# Altium PCB ADD.PcbDoc (part 2 of 3)
Units mm, origin at the board's own origin, x right, y up, seen from the top; angles counter-clockwise.
Board outline 193.67 x 275.84 mm, 2 copper layers (Top Layer, Bottom Layer); 216 components, 0 nets, 1200 pads, 0 vias.
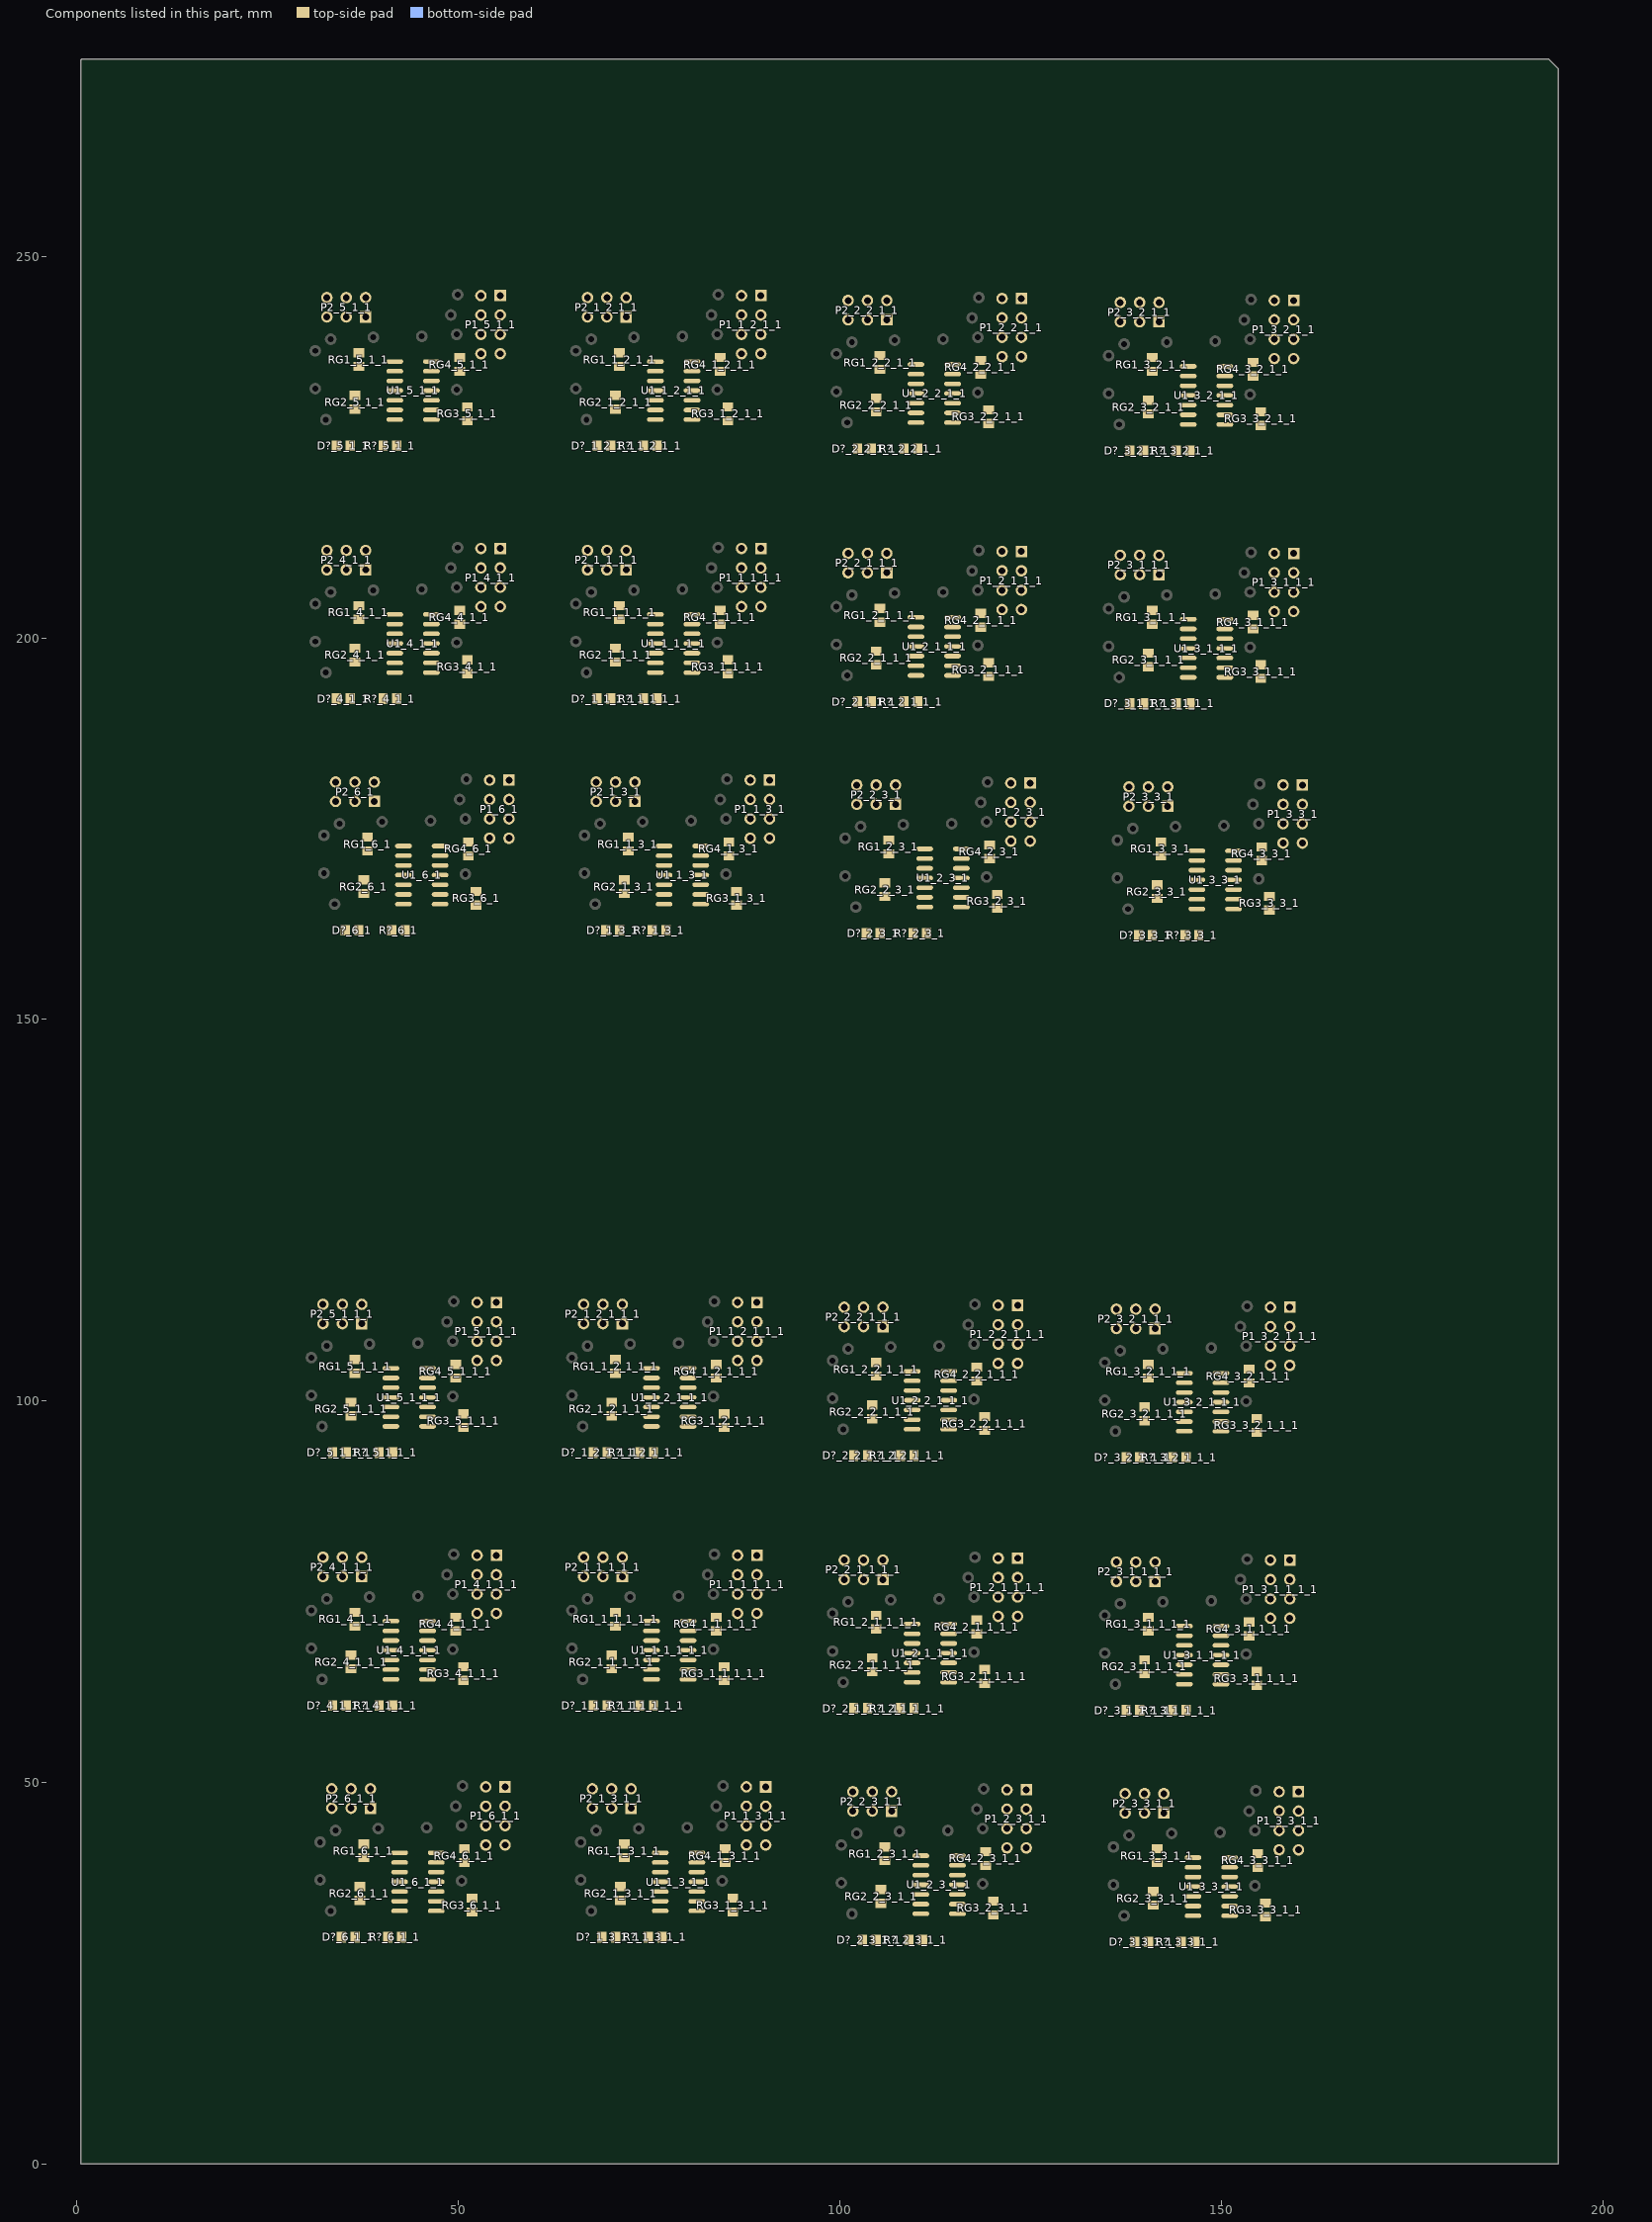
[diagram p2: the components of this part, seen from the top]

## Nets (pads, with @x,y where several pads share a name; then routed paths per layer and width w, separated by ;. In a path a pad name is that pad's centre, name@x,y a point inside that pad or via, vN(x,y) a via of type N, cw(c..) or ccw(c..) an arc to the next point about the centre after c; other vN are vias at no path point) (continued)
copper on no net: | length 9092.1
  Top Layer w0.254: 200.787,0 201.041,0.254 ; 0.508,0 0.508,275.717 0.635,275.844 192.913,275.844 194.183,274.574 194.183,0 0.508,0
  Top Layer w0.454: 28.88,69.532 29.451,68.961 39.738,68.961 40.119,68.58 40.5,68.58 ; 28.88,102.679 29.451,102.108 39.738,102.108 40.119,101.727 40.5,101.727 ; 29.388,201.486 29.959,200.914 40.246,200.914 40.627,200.533 41.008,200.533 ; 29.388,234.632 29.959,234.061 40.246,234.061 40.627,233.68 41.008,233.68 ; 30.023,39.179 30.594,38.608 40.881,38.608 41.262,38.227 41.643,38.227 ; 30.531,171.132 31.102,170.561 41.389,170.561 41.77,170.18 42.151,170.18 ; 30.721,72.517 30.721,75.438 32.245,76.962 ; 30.721,105.664 30.721,108.585 32.245,110.109 ; 31.229,204.47 31.229,207.391 32.753,208.915 ; 31.229,237.617 31.229,240.538 32.753,242.062 ; 31.864,42.164 31.864,45.085 33.388,46.609 ; 31.864,63.627 34.923,66.686 35.928,66.686 37.071,66.686 38.987,64.77 41.148,64.77 ; 31.864,96.774 34.923,99.833 35.928,99.833 37.071,99.833 38.987,97.917 41.148,97.917 ; 32.118,79.375 29.578,79.375 28.816,78.613 28.816,60.833 29.578,60.071 33.404,60.071 ; 32.118,112.522 29.578,112.522 28.816,111.76 28.816,93.98 29.578,93.218 33.404,93.218 ; 32.372,174.117 32.372,177.038 33.896,178.562 ; 32.372,195.58 35.431,198.639 36.436,198.639 37.579,198.639 39.495,196.723 41.656,196.723 ; 32.372,228.727 35.431,231.786 36.436,231.786 37.579,231.786 39.495,229.87 41.656,229.87 ; 32.626,211.328 30.086,211.328 29.324,210.566 29.324,192.786 30.086,192.024 33.912,192.024 ; 32.626,244.475 30.086,244.475 29.324,243.713 29.324,225.933 30.086,225.171 33.912,225.171 ; 32.753,74.041 32.753,71.247 34.034,69.966 41.032,69.966 41.148,69.85 ; 32.753,107.188 32.753,104.394 34.034,103.113 41.032,103.113 41.148,102.997 ; 33.007,33.274 36.066,36.333 37.071,36.333 38.214,36.333 40.13,34.417 42.291,34.417 ; 33.261,49.022 30.721,49.022 29.959,48.26 29.959,30.48 30.721,29.718 34.547,29.718 ; 33.261,205.994 33.261,203.2 34.542,201.919 41.54,201.919 41.656,201.803 ; 33.261,239.141 33.261,236.347 34.542,235.066 41.54,235.066 41.656,234.95 ; 33.515,165.227 36.574,168.286 37.579,168.286 38.722,168.286 40.638,166.37 42.799,166.37 ; 33.769,180.975 31.229,180.975 30.467,180.213 30.467,162.433 31.229,161.671 35.055,161.671 ; 33.896,43.688 33.896,40.894 35.177,39.613 42.175,39.613 42.291,39.497 ; 34.404,175.641 34.404,172.847 35.685,171.566 42.683,171.566 42.799,171.45 ; 34.785,76.962 34.785,74.93 35.42,74.295 38.341,74.295 ; 34.785,79.502 36.182,80.899 36.201,80.899 36.328,81.026 45.326,81.026 46.469,79.883 46.469,71.641 46.467,71.639 ; 34.785,110.109 34.785,108.077 35.42,107.442 38.341,107.442 ; 34.785,112.649 36.182,114.046 36.201,114.046 36.328,114.173 45.326,114.173 46.469,113.03 46.469,104.788 46.467,104.786 ; 35.293,208.915 35.293,206.883 35.928,206.248 38.849,206.248 ; 35.293,211.455 36.69,212.852 36.709,212.852 36.836,212.979 45.834,212.979 46.977,211.836 46.977,203.594 46.975,203.592 ; 35.293,242.062 35.293,240.03 35.928,239.395 38.849,239.395 ; 35.293,244.602 36.69,245.999 36.709,245.999 36.836,246.126 45.834,246.126 46.977,244.983 46.977,236.741 46.975,236.739 ; 35.304,60.071 39.6,60.071 ; 35.304,93.218 39.6,93.218 ; 35.812,192.024 40.108,192.024 ; 35.812,225.171 40.108,225.171 ; 35.928,46.609 35.928,44.577 36.563,43.942 39.484,43.942 ; 35.928,49.149 37.325,50.546 37.344,50.546 37.471,50.673 46.469,50.673 47.612,49.53 47.612,41.288 47.61,41.286 ; 35.928,64.886 35.939,64.897 37.071,64.897 38.468,63.5 41.148,63.5 43.04,63.5 43.04,79.248 42.786,79.502 37.325,79.502 ; 35.928,98.033 35.939,98.044 37.071,98.044 38.468,96.647 41.148,96.647 43.04,96.647 43.04,112.395 42.786,112.649 37.325,112.649 ; 36.436,178.562 36.436,176.53 37.071,175.895 39.992,175.895 ; 36.436,181.102 37.833,182.499 37.852,182.499 37.979,182.626 46.977,182.626 48.12,181.483 48.12,173.241 48.118,173.239 ; 36.436,196.839 36.447,196.85 37.579,196.85 38.976,195.453 41.656,195.453 43.548,195.453 43.548,211.201 43.294,211.455 37.833,211.455 ; 36.436,229.986 36.447,229.997 37.579,229.997 38.976,228.6 41.656,228.6 43.548,228.6 43.548,244.348 43.294,244.602 37.833,244.602 ; 36.447,29.718 40.743,29.718 ; 36.679,72.009 40.259,72.009 41.148,71.12 42.024,71.996 42.024,76.327 41.389,76.962 37.325,76.962 ; 36.679,105.156 40.259,105.156 41.148,104.267 42.024,105.143 42.024,109.474 41.389,110.109 37.325,110.109 ; 36.955,161.671 41.251,161.671 ; 37.071,34.533 37.082,34.544 38.214,34.544 39.611,33.147 42.291,33.147 44.183,33.147 44.183,48.895 43.929,49.149 38.468,49.149 ; 37.187,203.962 40.767,203.962 41.656,203.073 42.532,203.949 42.532,208.28 41.897,208.915 37.833,208.915 ; 37.187,237.109 40.767,237.109 41.656,236.22 42.532,237.096 42.532,241.427 41.897,242.062 37.833,242.062 ; 37.579,166.486 37.59,166.497 38.722,166.497 40.119,165.1 42.799,165.1 44.691,165.1 44.691,180.848 44.437,181.102 38.976,181.102 ; 37.822,41.656 41.402,41.656 42.291,40.767 43.167,41.643 43.167,45.974 42.532,46.609 38.468,46.609 ; 38.33,173.609 41.91,173.609 42.799,172.72 43.675,173.596 43.675,177.927 43.04,178.562 38.976,178.562 ; 41.148,67.31 39.103,67.31 38.214,68.199 30.34,68.199 30.34,61.722 41.262,61.722 41.4,61.584 41.4,60.071 54.597,60.071 54.978,60.452 54.978,72.136 54.978,74.676 54.978,77.216 54.978,79.756 ; 41.148,100.457 39.103,100.457 38.214,101.346 30.34,101.346 30.34,94.869 41.262,94.869 41.4,94.731 41.4,93.218 54.597,93.218 54.978,93.599 54.978,105.283 54.978,107.823 54.978,110.363 54.978,112.903 ; 41.656,199.263 39.611,199.263 38.722,200.152 30.848,200.152 30.848,193.675 41.77,193.675 41.908,193.537 41.908,192.024 55.105,192.024 55.486,192.405 55.486,204.089 55.486,206.629 55.486,209.169 55.486,211.709 ; 41.656,232.41 39.611,232.41 38.722,233.299 30.848,233.299 30.848,226.822 41.77,226.822 41.908,226.684 41.908,225.171 55.105,225.171 55.486,225.552 55.486,237.236 55.486,239.776 55.486,242.316 55.486,244.856 ; 42.291,36.957 40.246,36.957 39.357,37.846 31.483,37.846 31.483,31.369 42.405,31.369 42.543,31.231 42.543,29.718 55.74,29.718 56.121,30.099 56.121,41.783 56.121,44.323 56.121,46.863 56.121,49.403 ; 42.799,168.91 40.754,168.91 39.865,169.799 31.991,169.799 31.991,163.322 42.913,163.322 43.051,163.184 43.051,161.671 56.248,161.671 56.629,162.052 56.629,173.736 56.629,176.276 56.629,178.816 56.629,181.356 ; 44.31,74.803 44.691,74.422 44.048,73.779 44.048,63.889 44.437,63.5 45.948,63.5 50.522,63.5 50.66,63.362 ; 44.31,107.95 44.691,107.569 44.048,106.926 44.048,97.036 44.437,96.647 45.948,96.647 50.522,96.647 50.66,96.509 ; 44.818,206.756 45.199,206.375 44.556,205.732 44.556,195.842 44.945,195.453 46.456,195.453 51.03,195.453 51.168,195.315 ; 44.818,239.903 45.199,239.522 44.556,238.879 44.556,228.989 44.945,228.6 46.456,228.6 51.03,228.6 51.168,228.462 ; 45.453,44.45 45.834,44.069 45.191,43.426 45.191,33.536 45.58,33.147 47.091,33.147 51.665,33.147 51.803,33.009 ; 45.709,66.04 45.948,66.04 45.948,68.58 ; 45.709,99.187 45.948,99.187 45.948,101.727 ; 45.948,64.77 48.755,64.77 49.147,65.162 50.66,65.162 50.66,67.056 50.279,67.437 49.263,67.437 ; 45.948,71.12 46.467,71.639 ; 45.948,97.917 48.755,97.917 49.147,98.309 50.66,98.309 50.66,100.203 50.279,100.584 49.263,100.584 ; 45.948,104.267 46.467,104.786 ; 45.961,176.403 46.342,176.022 45.699,175.379 45.699,165.489 46.088,165.1 47.599,165.1 52.173,165.1 52.311,164.962 ; 46.064,69.966 45.948,69.85 45.959,69.839 49.644,69.839 52.046,69.839 52.438,70.231 52.438,72.136 ; 46.064,103.113 45.948,102.997 45.959,102.986 49.644,102.986 52.046,102.986 52.438,103.378 52.438,105.283 ; 46.217,197.993 46.456,197.993 46.456,200.533 ; 46.217,231.14 46.456,231.14 46.456,233.68 ; 46.456,196.723 49.263,196.723 49.655,197.115 51.168,197.115 51.168,199.009 50.787,199.39 49.771,199.39 ; 46.456,203.073 46.975,203.592 ; 46.456,229.87 49.263,229.87 49.655,230.262 51.168,230.262 51.168,232.156 50.787,232.537 49.771,232.537 ; 46.456,236.22 46.975,236.739 ; 46.572,201.919 46.456,201.803 46.467,201.792 50.152,201.792 52.554,201.792 52.946,202.184 52.946,204.089 ; 46.572,235.066 46.456,234.95 46.467,234.939 50.152,234.939 52.554,234.939 52.946,235.331 52.946,237.236 ; 46.852,35.687 47.091,35.687 47.091,38.227 ; 47.091,34.417 49.898,34.417 50.29,34.809 51.803,34.809 51.803,36.703 51.422,37.084 50.406,37.084 ; 47.091,40.767 47.61,41.286 ; 47.207,39.613 47.091,39.497 47.102,39.486 50.787,39.486 53.189,39.486 53.581,39.878 53.581,41.783 ; 47.36,167.64 47.599,167.64 47.599,170.18 ; 47.599,166.37 50.406,166.37 50.798,166.762 52.311,166.762 52.311,168.656 51.93,169.037 50.914,169.037 ; 47.599,172.72 48.118,173.239 ; 47.715,171.566 47.599,171.45 47.61,171.439 51.295,171.439 53.697,171.439 54.089,171.831 54.089,173.736 ; 48.501,77.216 52.438,77.216 ; 48.501,110.363 52.438,110.363 ; 49.009,209.169 52.946,209.169 ; 49.009,242.316 52.946,242.316 ; 49.263,74.676 52.438,74.676 ; 49.263,107.823 52.438,107.823 ; 49.644,46.863 53.581,46.863 ; 49.644,71.639 46.467,71.639 ; 49.644,79.756 52.438,79.756 ; 49.644,104.786 46.467,104.786 ; 49.644,112.903 52.438,112.903 ; 49.771,206.629 52.946,206.629 ; 49.771,239.776 52.946,239.776 ; 50.152,178.816 54.089,178.816 ; 50.152,203.592 46.975,203.592 ; 50.152,211.709 52.946,211.709 ; 50.152,236.739 46.975,236.739 ; 50.152,244.856 52.946,244.856 ; 50.406,44.323 53.581,44.323 ; 50.787,41.286 47.61,41.286 ; 50.787,49.403 53.581,49.403 ; 50.914,176.276 54.089,176.276 ; 51.295,173.239 48.118,173.239 ; 51.295,181.356 54.089,181.356 ; 63.043,69.532 63.614,68.961 73.901,68.961 74.282,68.58 74.663,68.58 ; 63.043,102.679 63.614,102.108 73.901,102.108 74.282,101.727 74.663,101.727 ; 63.551,201.486 64.122,200.914 74.409,200.914 74.79,200.533 75.171,200.533 ; 63.551,234.632 64.122,234.061 74.409,234.061 74.79,233.68 75.171,233.68 ; 64.186,39.179 64.757,38.608 75.044,38.608 75.425,38.227 75.806,38.227 ; 64.694,171.132 65.265,170.561 75.552,170.561 75.933,170.18 76.314,170.18 ; 64.884,72.517 64.884,75.438 66.408,76.962 ; 64.884,105.664 64.884,108.585 66.408,110.109 ; 65.392,204.47 65.392,207.391 66.916,208.915 ; 65.392,237.617 65.392,240.538 66.916,242.062 ; 66.027,42.164 66.027,45.085 67.551,46.609 ; 66.027,63.627 69.086,66.686 70.091,66.686 71.234,66.686 73.15,64.77 75.311,64.77 ; 66.027,96.774 69.086,99.833 70.091,99.833 71.234,99.833 73.15,97.917 75.311,97.917 ; 66.281,79.375 63.741,79.375 62.979,78.613 62.979,60.833 63.741,60.071 67.567,60.071 ; 66.281,112.522 63.741,112.522 62.979,111.76 62.979,93.98 63.741,93.218 67.567,93.218 ; 66.535,174.117 66.535,177.038 68.059,178.562 ; 66.535,195.58 69.594,198.639 70.599,198.639 71.742,198.639 73.658,196.723 75.819,196.723 ; 66.535,228.727 69.594,231.786 70.599,231.786 71.742,231.786 73.658,229.87 75.819,229.87 ; 66.789,211.328 64.249,211.328 63.487,210.566 63.487,192.786 64.249,192.024 68.075,192.024 ; 66.789,244.475 64.249,244.475 63.487,243.713 63.487,225.933 64.249,225.171 68.075,225.171 ; 66.916,74.041 66.916,71.247 68.197,69.966 75.195,69.966 75.311,69.85 ; 66.916,107.188 66.916,104.394 68.197,103.113 75.195,103.113 75.311,102.997 ; 67.17,33.274 70.229,36.333 71.234,36.333 72.377,36.333 74.293,34.417 76.454,34.417 ; 67.424,49.022 64.884,49.022 64.122,48.26 64.122,30.48 64.884,29.718 68.71,29.718 ; 67.424,205.994 67.424,203.2 68.705,201.919 75.703,201.919 75.819,201.803 ; 67.424,239.141 67.424,236.347 68.705,235.066 75.703,235.066 75.819,234.95 ; 67.678,165.227 70.737,168.286 71.742,168.286 72.885,168.286 74.801,166.37 76.962,166.37 ; 67.932,180.975 65.392,180.975 64.63,180.213 64.63,162.433 65.392,161.671 69.218,161.671 ; 68.059,43.688 68.059,40.894 69.34,39.613 76.338,39.613 76.454,39.497 ; 68.567,175.641 68.567,172.847 69.848,171.566 76.846,171.566 76.962,171.45 ; 68.948,76.962 68.948,74.93 69.583,74.295 72.504,74.295 ; 68.948,79.502 70.345,80.899 70.364,80.899 70.491,81.026 79.489,81.026 80.632,79.883 80.632,71.641 80.63,71.639 ; 68.948,110.109 68.948,108.077 69.583,107.442 72.504,107.442 ; 68.948,112.649 70.345,114.046 70.364,114.046 70.491,114.173 79.489,114.173 80.632,113.03 80.632,104.788 80.63,104.786 ; 69.456,208.915 69.456,206.883 70.091,206.248 73.012,206.248 ; 69.456,211.455 70.853,212.852 70.872,212.852 70.999,212.979 79.997,212.979 81.14,211.836 81.14,203.594 81.138,203.592 ; 69.456,242.062 69.456,240.03 70.091,239.395 73.012,239.395 ; 69.456,244.602 70.853,245.999 70.872,245.999 70.999,246.126 79.997,246.126 81.14,244.983 81.14,236.741 81.138,236.739 ; 69.467,60.071 73.763,60.071 ; 69.467,93.218 73.763,93.218 ; 69.975,192.024 74.271,192.024 ; 69.975,225.171 74.271,225.171 ; 70.091,46.609 70.091,44.577 70.726,43.942 73.647,43.942 ; 70.091,49.149 71.488,50.546 71.507,50.546 71.634,50.673 80.632,50.673 81.775,49.53 81.775,41.288 81.773,41.286 ; 70.091,64.886 70.102,64.897 71.234,64.897 72.631,63.5 75.311,63.5 77.203,63.5 77.203,79.248 76.949,79.502 71.488,79.502 ; 70.091,98.033 70.102,98.044 71.234,98.044 72.631,96.647 75.311,96.647 77.203,96.647 77.203,112.395 76.949,112.649 71.488,112.649 ; 70.599,178.562 70.599,176.53 71.234,175.895 74.155,175.895 ; 70.599,181.102 71.996,182.499 72.015,182.499 72.142,182.626 81.14,182.626 82.283,181.483 82.283,173.241 82.281,173.239 ; 70.599,196.839 70.61,196.85 71.742,196.85 73.139,195.453 75.819,195.453 77.711,195.453 77.711,211.201 77.457,211.455 71.996,211.455 ; 70.599,229.986 70.61,229.997 71.742,229.997 73.139,228.6 75.819,228.6 77.711,228.6 77.711,244.348 77.457,244.602 71.996,244.602 ; 70.61,29.718 74.906,29.718 ; 70.842,72.009 74.422,72.009 75.311,71.12 76.187,71.996 76.187,76.327 75.552,76.962 71.488,76.962 ; 70.842,105.156 74.422,105.156 75.311,104.267 76.187,105.143 76.187,109.474 75.552,110.109 71.488,110.109 ; 71.118,161.671 75.414,161.671 ; 71.234,34.533 71.245,34.544 72.377,34.544 73.774,33.147 76.454,33.147 78.346,33.147 78.346,48.895 78.092,49.149 72.631,49.149 ; 71.35,203.962 74.93,203.962 75.819,203.073 76.695,203.949 76.695,208.28 76.06,208.915 71.996,208.915 ; 71.35,237.109 74.93,237.109 75.819,236.22 76.695,237.096 76.695,241.427 76.06,242.062 71.996,242.062 ; 71.742,166.486 71.753,166.497 72.885,166.497 74.282,165.1 76.962,165.1 78.854,165.1 78.854,180.848 78.6,181.102 73.139,181.102 ; 71.985,41.656 75.565,41.656 76.454,40.767 77.33,41.643 77.33,45.974 76.695,46.609 72.631,46.609 ; 72.493,173.609 76.073,173.609 76.962,172.72 77.838,173.596 77.838,177.927 77.203,178.562 73.139,178.562 ; 75.311,67.31 73.266,67.31 72.377,68.199 64.503,68.199 64.503,61.722 75.425,61.722 75.563,61.584 75.563,60.071 88.76,60.071 89.141,60.452 89.141,72.136 89.141,74.676 89.141,77.216 89.141,79.756 ; 75.311,100.457 73.266,100.457 72.377,101.346 64.503,101.346 64.503,94.869 75.425,94.869 75.563,94.731 75.563,93.218 88.76,93.218 89.141,93.599 89.141,105.283 89.141,107.823 89.141,110.363 89.141,112.903 ; 75.819,199.263 73.774,199.263 72.885,200.152 65.011,200.152 65.011,193.675 75.933,193.675 76.071,193.537 76.071,192.024 89.268,192.024 89.649,192.405 89.649,204.089 89.649,206.629 89.649,209.169 89.649,211.709 ; 75.819,232.41 73.774,232.41 72.885,233.299 65.011,233.299 65.011,226.822 75.933,226.822 76.071,226.684 76.071,225.171 89.268,225.171 89.649,225.552 89.649,237.236 89.649,239.776 89.649,242.316 89.649,244.856 ; 76.454,36.957 74.409,36.957 73.52,37.846 65.646,37.846 65.646,31.369 76.568,31.369 76.706,31.231 76.706,29.718 89.903,29.718 90.284,30.099 90.284,41.783 90.284,44.323 90.284,46.863 90.284,49.403 ; 76.962,168.91 74.917,168.91 74.028,169.799 66.154,169.799 66.154,163.322 77.076,163.322 77.214,163.184 77.214,161.671 90.411,161.671 90.792,162.052 90.792,173.736 90.792,176.276 90.792,178.816 90.792,181.356 ; 78.473,74.803 78.854,74.422 78.211,73.779 78.211,63.889 78.6,63.5 80.111,63.5 84.685,63.5 84.823,63.362 ; 78.473,107.95 78.854,107.569 78.211,106.926 78.211,97.036 78.6,96.647 80.111,96.647 84.685,96.647 84.823,96.509 ; 78.981,206.756 79.362,206.375 78.719,205.732 78.719,195.842 79.108,195.453 80.619,195.453 85.193,195.453 85.331,195.315 ; 78.981,239.903 79.362,239.522 78.719,238.879 78.719,228.989 79.108,228.6 80.619,228.6 85.193,228.6 85.331,228.462 ; 79.616,44.45 79.997,44.069 79.354,43.426 79.354,33.536 79.743,33.147 81.254,33.147 85.828,33.147 85.966,33.009 ; 79.872,66.04 80.111,66.04 80.111,68.58 ; 79.872,99.187 80.111,99.187 80.111,101.727 ; 80.111,64.77 82.918,64.77 83.31,65.162 84.823,65.162 84.823,67.056 84.442,67.437 83.426,67.437 ; 80.111,71.12 80.63,71.639 ; 80.111,97.917 82.918,97.917 83.31,98.309 84.823,98.309 84.823,100.203 84.442,100.584 83.426,100.584 ; 80.111,104.267 80.63,104.786 ; 80.124,176.403 80.505,176.022 79.862,175.379 79.862,165.489 80.251,165.1 81.762,165.1 86.336,165.1 86.474,164.962 ; 80.227,69.966 80.111,69.85 80.122,69.839 83.807,69.839 86.209,69.839 86.601,70.231 86.601,72.136 ; 80.227,103.113 80.111,102.997 80.122,102.986 83.807,102.986 86.209,102.986 86.601,103.378 86.601,105.283 ; 80.38,197.993 80.619,197.993 80.619,200.533 ; 80.38,231.14 80.619,231.14 80.619,233.68 ; 80.619,196.723 83.426,196.723 83.818,197.115 85.331,197.115 85.331,199.009 84.95,199.39 83.934,199.39 ; 80.619,203.073 81.138,203.592 ; 80.619,229.87 83.426,229.87 83.818,230.262 85.331,230.262 85.331,232.156 84.95,232.537 83.934,232.537 ; 80.619,236.22 81.138,236.739 ; 80.735,201.919 80.619,201.803 80.63,201.792 84.315,201.792 86.717,201.792 87.109,202.184 87.109,204.089 ; 80.735,235.066 80.619,234.95 80.63,234.939 84.315,234.939 86.717,234.939 87.109,235.331 87.109,237.236 ; 81.015,35.687 81.254,35.687 81.254,38.227 ; 81.254,34.417 84.061,34.417 84.453,34.809 85.966,34.809 85.966,36.703 85.585,37.084 84.569,37.084 ; 81.254,40.767 81.773,41.286 ; 81.37,39.613 81.254,39.497 81.265,39.486 84.95,39.486 87.352,39.486 87.744,39.878 87.744,41.783 ; 81.523,167.64 81.762,167.64 81.762,170.18 ; 81.762,166.37 84.569,166.37 84.961,166.762 86.474,166.762 86.474,168.656 86.093,169.037 85.077,169.037 ; 81.762,172.72 82.281,173.239 ; 81.878,171.566 81.762,171.45 81.773,171.439 85.458,171.439 87.86,171.439 88.252,171.831 88.252,173.736 ; 82.664,77.216 86.601,77.216 ; 82.664,110.363 86.601,110.363 ; 83.172,209.169 87.109,209.169 ; 83.172,242.316 87.109,242.316 ; 83.426,74.676 86.601,74.676 ; 83.426,107.823 86.601,107.823 ; 83.807,46.863 87.744,46.863 ; 83.807,71.639 80.63,71.639 ; 83.807,79.756 86.601,79.756 ; 83.807,104.786 80.63,104.786 ; 83.807,112.903 86.601,112.903 ; 83.934,206.629 87.109,206.629 ; 83.934,239.776 87.109,239.776 ; 84.315,178.816 88.252,178.816 ; 84.315,203.592 81.138,203.592 ; 84.315,211.709 87.109,211.709 ; 84.315,236.739 81.138,236.739 ; 84.315,244.856 87.109,244.856 ; 84.569,44.323 87.744,44.323 ; 84.95,41.286 81.773,41.286 ; 84.95,49.403 87.744,49.403 ; 85.077,176.276 88.252,176.276 ; 85.458,173.239 82.281,173.239 ; 85.458,181.356 88.252,181.356 ; 97.206,69.151 97.777,68.58 108.064,68.58 108.445,68.199 108.826,68.199 ; 97.206,102.298 97.777,101.727 108.064,101.727 108.445,101.346 108.826,101.346 ; 97.714,201.105 98.285,200.533 108.572,200.533 108.953,200.152 109.334,200.152 ; 97.714,234.251 98.285,233.68 108.572,233.68 108.953,233.299 109.334,233.299 ; 98.349,38.798 98.92,38.227 109.207,38.227 109.588,37.846 109.969,37.846 ; 98.857,170.751 99.428,170.18 109.715,170.18 110.096,169.799 110.477,169.799 ; 99.047,72.136 99.047,75.057 100.571,76.581 ; 99.047,105.283 99.047,108.204 100.571,109.728 ; 99.555,204.089 99.555,207.01 101.079,208.534 ; 99.555,237.236 99.555,240.157 101.079,241.681 ; 100.19,41.783 100.19,44.704 101.714,46.228 ; 100.19,63.246 103.249,66.305 104.254,66.305 105.397,66.305 107.313,64.389 109.474,64.389 ; 100.19,96.393 103.249,99.452 104.254,99.452 105.397,99.452 107.313,97.536 109.474,97.536 ; 100.444,78.994 97.904,78.994 97.142,78.232 97.142,60.452 97.904,59.69 101.73,59.69 ; 100.444,112.141 97.904,112.141 97.142,111.379 97.142,93.599 97.904,92.837 101.73,92.837 ; 100.698,173.736 100.698,176.657 102.222,178.181 ; 100.698,195.199 103.757,198.258 104.762,198.258 105.905,198.258 107.821,196.342 109.982,196.342 ; 100.698,228.346 103.757,231.405 104.762,231.405 105.905,231.405 107.821,229.489 109.982,229.489 ; 100.952,210.947 98.412,210.947 97.65,210.185 97.65,192.405 98.412,191.643 102.238,191.643 ; 100.952,244.094 98.412,244.094 97.65,243.332 97.65,225.552 98.412,224.79 102.238,224.79 ; 101.079,73.66 101.079,70.866 102.36,69.585 109.358,69.585 109.474,69.469 ; 101.079,106.807 101.079,104.013 102.36,102.732 109.358,102.732 109.474,102.616 ; 101.333,32.893 104.392,35.952 105.397,35.952 106.54,35.952 108.456,34.036 110.617,34.036 ; 101.587,48.641 99.047,48.641 98.285,47.879 98.285,30.099 99.047,29.337 102.873,29.337 ; 101.587,205.613 101.587,202.819 102.868,201.538 109.866,201.538 109.982,201.422 ; 101.587,238.76 101.587,235.966 102.868,234.685 109.866,234.685 109.982,234.569 ; 101.841,164.846 104.9,167.905 105.905,167.905 107.048,167.905 108.964,165.989 111.125,165.989 ; 102.095,180.594 99.555,180.594 98.793,179.832 98.793,162.052 99.555,161.29 103.381,161.29 ; 102.222,43.307 102.222,40.513 103.503,39.232 110.501,39.232 110.617,39.116 ; 102.73,175.26 102.73,172.466 104.011,171.185 111.009,171.185 111.125,171.069 ; 103.111,76.581 103.111,74.549 103.746,73.914 106.667,73.914 ; 103.111,79.121 104.508,80.518 104.527,80.518 104.654,80.645 113.652,80.645 114.795,79.502 114.795,71.26 114.793,71.258 ; 103.111,109.728 103.111,107.696 103.746,107.061 106.667,107.061 ; 103.111,112.268 104.508,113.665 104.527,113.665 104.654,113.792 113.652,113.792 114.795,112.649 114.795,104.407 114.793,104.405 ; 103.619,208.534 103.619,206.502 104.254,205.867 107.175,205.867 ; 103.619,211.074 105.016,212.471 105.035,212.471 105.162,212.598 114.16,212.598 115.303,211.455 115.303,203.213 115.301,203.211 ; 103.619,241.681 103.619,239.649 104.254,239.014 107.175,239.014 ; 103.619,244.221 105.016,245.618 105.035,245.618 105.162,245.745 114.16,245.745 115.303,244.602 115.303,236.36 115.301,236.358 ; 103.63,59.69 107.926,59.69 ; 103.63,92.837 107.926,92.837 ; 104.138,191.643 108.434,191.643 ; 104.138,224.79 108.434,224.79 ; 104.254,46.228 104.254,44.196 104.889,43.561 107.81,43.561 ; 104.254,48.768 105.651,50.165 105.67,50.165 105.797,50.292 114.795,50.292 115.938,49.149 115.938,40.907 115.936,40.905 ; 104.254,64.505 104.265,64.516 105.397,64.516 106.794,63.119 109.474,63.119 111.366,63.119 111.366,78.867 111.112,79.121 105.651,79.121 ; 104.254,97.652 104.265,97.663 105.397,97.663 106.794,96.266 109.474,96.266 111.366,96.266 111.366,112.014 111.112,112.268 105.651,112.268 ; 104.762,178.181 104.762,176.149 105.397,175.514 108.318,175.514 ; 104.762,180.721 106.159,182.118 106.178,182.118 106.305,182.245 115.303,182.245 116.446,181.102 116.446,172.86 116.444,172.858 ; 104.762,196.458 104.773,196.469 105.905,196.469 107.302,195.072 109.982,195.072 111.874,195.072 111.874,210.82 111.62,211.074 106.159,211.074 ; 104.762,229.605 104.773,229.616 105.905,229.616 107.302,228.219 109.982,228.219 111.874,228.219 111.874,243.967 111.62,244.221 106.159,244.221 ; 104.773,29.337 109.069,29.337 ; 105.005,71.628 108.585,71.628 109.474,70.739 110.35,71.615 110.35,75.946 109.715,76.581 105.651,76.581 ; 105.005,104.775 108.585,104.775 109.474,103.886 110.35,104.762 110.35,109.093 109.715,109.728 105.651,109.728 ; 105.281,161.29 109.577,161.29 ; 105.397,34.152 105.408,34.163 106.54,34.163 107.937,32.766 110.617,32.766 112.509,32.766 112.509,48.514 112.255,48.768 106.794,48.768 ; 105.513,203.581 109.093,203.581 109.982,202.692 110.858,203.568 110.858,207.899 110.223,208.534 106.159,208.534 ; 105.513,236.728 109.093,236.728 109.982,235.839 110.858,236.715 110.858,241.046 110.223,241.681 106.159,241.681 ; 105.905,166.105 105.916,166.116 107.048,166.116 108.445,164.719 111.125,164.719 113.017,164.719 113.017,180.467 112.763,180.721 107.302,180.721 ; 106.148,41.275 109.728,41.275 110.617,40.386 111.493,41.262 111.493,45.593 110.858,46.228 106.794,46.228 ; 106.656,173.228 110.236,173.228 111.125,172.339 112.001,173.215 112.001,177.546 111.366,178.181 107.302,178.181 ; 109.474,66.929 107.429,66.929 106.54,67.818 98.666,67.818 98.666,61.341 109.588,61.341 109.726,61.203 109.726,59.69 122.923,59.69 123.304,60.071 123.304,71.755 123.304,74.295 123.304,76.835 123.304,79.375 ; 109.474,100.076 107.429,100.076 106.54,100.965 98.666,100.965 98.666,94.488 109.588,94.488 109.726,94.35 109.726,92.837 122.923,92.837 123.304,93.218 123.304,104.902 123.304,107.442 123.304,109.982 123.304,112.522 ; 109.982,198.882 107.937,198.882 107.048,199.771 99.174,199.771 99.174,193.294 110.096,193.294 110.234,193.156 110.234,191.643 123.431,191.643 123.812,192.024 123.812,203.708 123.812,206.248 123.812,208.788 123.812,211.328 ; 109.982,232.029 107.937,232.029 107.048,232.918 99.174,232.918 99.174,226.441 110.096,226.441 110.234,226.303 110.234,224.79 123.431,224.79 123.812,225.171 123.812,236.855 123.812,239.395 123.812,241.935 123.812,244.475 ; 110.617,36.576 108.572,36.576 107.683,37.465 99.809,37.465 99.809,30.988 110.731,30.988 110.869,30.85 110.869,29.337 124.066,29.337 124.447,29.718 124.447,41.402 124.447,43.942 124.447,46.482 124.447,49.022 ; 111.125,168.529 109.08,168.529 108.191,169.418 100.317,169.418 100.317,162.941 111.239,162.941 111.377,162.803 111.377,161.29 124.574,161.29 124.955,161.671 124.955,173.355 124.955,175.895 124.955,178.435 124.955,180.975 ; 112.636,74.422 113.017,74.041 112.374,73.398 112.374,63.508 112.763,63.119 114.274,63.119 118.848,63.119 118.986,62.981 ; 112.636,107.569 113.017,107.188 112.374,106.545 112.374,96.655 112.763,96.266 114.274,96.266 118.848,96.266 118.986,96.128 ; 113.144,206.375 113.525,205.994 112.882,205.351 112.882,195.461 113.271,195.072 114.782,195.072 119.356,195.072 119.494,194.934 ; 113.144,239.522 113.525,239.141 112.882,238.498 112.882,228.608 113.271,228.219 114.782,228.219 119.356,228.219 119.494,228.081 ; 113.779,44.069 114.16,43.688 113.517,43.045 113.517,33.155 113.906,32.766 115.417,32.766 119.991,32.766 120.129,32.628 ; 114.035,65.659 114.274,65.659 114.274,68.199 ; 114.035,98.806 114.274,98.806 114.274,101.346 ; 114.274,64.389 117.081,64.389 117.473,64.781 118.986,64.781 118.986,66.675 118.605,67.056 117.589,67.056 ; 114.274,70.739 114.793,71.258 ; 114.274,97.536 117.081,97.536 117.473,97.928 118.986,97.928 118.986,99.822 118.605,100.203 117.589,100.203 ; 114.274,103.886 114.793,104.405 ; 114.287,176.022 114.668,175.641 114.025,174.998 114.025,165.108 114.414,164.719 115.925,164.719 120.499,164.719 120.637,164.581 ; 114.39,69.585 114.274,69.469 114.285,69.458 117.97,69.458 120.372,69.458 120.764,69.85 120.764,71.755 ; 114.39,102.732 114.274,102.616 114.285,102.605 117.97,102.605 120.372,102.605 120.764,102.997 120.764,104.902 ; 114.543,197.612 114.782,197.612 114.782,200.152 ; 114.543,230.759 114.782,230.759 114.782,233.299 ; 114.782,196.342 117.589,196.342 117.981,196.734 119.494,196.734 119.494,198.628 119.113,199.009 118.097,199.009 ; 114.782,202.692 115.301,203.211 ; 114.782,229.489 117.589,229.489 117.981,229.881 119.494,229.881 119.494,231.775 119.113,232.156 118.097,232.156 ; 114.782,235.839 115.301,236.358 ; 114.898,201.538 114.782,201.422 114.793,201.411 118.478,201.411 120.88,201.411 121.272,201.803 121.272,203.708 ; 114.898,234.685 114.782,234.569 114.793,234.558 118.478,234.558 120.88,234.558 121.272,234.95 121.272,236.855 ; 115.178,35.306 115.417,35.306 115.417,37.846 ; 115.417,34.036 118.224,34.036 118.616,34.428 120.129,34.428 120.129,36.322 119.748,36.703 118.732,36.703 ; 115.417,40.386 115.936,40.905 ; 115.533,39.232 115.417,39.116 115.428,39.105 119.113,39.105 121.515,39.105 121.907,39.497 121.907,41.402 ; 115.686,167.259 115.925,167.259 115.925,169.799 ; 115.925,165.989 118.732,165.989 119.124,166.381 120.637,166.381 120.637,168.275 120.256,168.656 119.24,168.656 ; 115.925,172.339 116.444,172.858 ; 116.041,171.185 115.925,171.069 115.936,171.058 119.621,171.058 122.023,171.058 122.415,171.45 122.415,173.355 ; 116.827,76.835 120.764,76.835 ; 116.827,109.982 120.764,109.982 ; 117.335,208.788 121.272,208.788 ; 117.335,241.935 121.272,241.935 ; 117.589,74.295 120.764,74.295 ; 117.589,107.442 120.764,107.442 ; 117.97,46.482 121.907,46.482 ; 117.97,71.258 114.793,71.258 ; 117.97,79.375 120.764,79.375 ; 117.97,104.405 114.793,104.405 ; 117.97,112.522 120.764,112.522 ; 118.097,206.248 121.272,206.248 ; 118.097,239.395 121.272,239.395 ; 118.478,178.435 122.415,178.435 ; 118.478,203.211 115.301,203.211 ; 118.478,211.328 121.272,211.328 ; 118.478,236.358 115.301,236.358 ; 118.478,244.475 121.272,244.475 ; 118.732,43.942 121.907,43.942 ; 119.113,40.905 115.936,40.905 ; 119.113,49.022 121.907,49.022 ; 119.24,175.895 122.415,175.895 ; 119.621,172.858 116.444,172.858 ; 119.621,180.975 122.415,180.975 ; 132.893,68.897 133.464,68.326 143.751,68.326 144.132,67.945 144.513,67.945 ; 132.893,102.044 133.464,101.473 143.751,101.473 144.132,101.092 144.513,101.092 ; 133.401,200.85 133.972,200.279 144.259,200.279 144.64,199.898 145.021,199.898 ; 133.401,233.998 133.972,233.426 144.259,233.426 144.64,233.045 145.021,233.045 ; 134.036,38.544 134.607,37.973 144.894,37.973 145.275,37.592 145.656,37.592 ; 134.544,170.498 135.115,169.926 145.402,169.926 145.783,169.545 146.164,169.545 ; 134.734,71.882 134.734,74.803 136.258,76.327 ; 134.734,105.029 134.734,107.95 136.258,109.474 ; 135.242,203.835 135.242,206.756 136.766,208.28 ; 135.242,236.982 135.242,239.903 136.766,241.427 ; 135.877,41.529 135.877,44.45 137.401,45.974 ; 135.877,62.992 138.936,66.051 139.941,66.051 141.084,66.051 143,64.135 145.161,64.135 ; 135.877,96.139 138.936,99.198 139.941,99.198 141.084,99.198 143,97.282 145.161,97.282 ; 136.131,78.74 133.591,78.74 132.829,77.978 132.829,60.198 133.591,59.436 137.417,59.436 ; 136.131,111.887 133.591,111.887 132.829,111.125 132.829,93.345 133.591,92.583 137.417,92.583 ; 136.385,173.482 136.385,176.403 137.909,177.927 ; 136.385,194.945 139.444,198.004 140.449,198.004 141.592,198.004 143.508,196.088 145.669,196.088 ; 136.385,228.092 139.444,231.151 140.449,231.151 141.592,231.151 143.508,229.235 145.669,229.235 ; 136.639,210.693 134.099,210.693 133.337,209.931 133.337,192.151 134.099,191.389 137.925,191.389 ; 136.639,243.84 134.099,243.84 133.337,243.078 133.337,225.298 134.099,224.536 137.925,224.536 ; 136.766,73.406 136.766,70.612 138.047,69.331 145.045,69.331 145.161,69.215 ; 136.766,106.553 136.766,103.759 138.047,102.478 145.045,102.478 145.161,102.362 ; 137.02,32.639 140.079,35.698 141.084,35.698 142.227,35.698 144.143,33.782 146.304,33.782 ; 137.274,48.387 134.734,48.387 133.972,47.625 133.972,29.845 134.734,29.083 138.56,29.083 ; 137.274,205.359 137.274,202.565 138.555,201.284 145.553,201.284 145.669,201.168 ; 137.274,238.506 137.274,235.712 138.555,234.431 145.553,234.431 145.669,234.315 ; 137.528,164.592 140.587,167.651 141.592,167.651 142.735,167.651 144.651,165.735 146.812,165.735 ; 137.782,180.34 135.242,180.34 134.48,179.578 134.48,161.798 135.242,161.036 139.068,161.036 ; 137.909,43.053 137.909,40.259 139.19,38.978 146.188,38.978 146.304,38.862 ; 138.417,175.006 138.417,172.212 139.698,170.931 146.696,170.931 146.812,170.815 ; 138.798,76.327 138.798,74.295 139.433,73.66 142.354,73.66 ; 138.798,78.867 140.195,80.264 140.214,80.264 140.341,80.391 149.339,80.391 150.482,79.248 150.482,71.006 150.48,71.004 ; 138.798,109.474 138.798,107.442 139.433,106.807 142.354,106.807 ; 138.798,112.014 140.195,113.411 140.214,113.411 140.341,113.538 149.339,113.538 150.482,112.395 150.482,104.153 150.48,104.151 ; 139.306,208.28 139.306,206.248 139.941,205.613 142.862,205.613 ; 139.306,210.82 140.703,212.217 140.722,212.217 140.849,212.344 149.847,212.344 150.99,211.201 150.99,202.959 150.988,202.957 ; 139.306,241.427 139.306,239.395 139.941,238.76 142.862,238.76 ; 139.306,243.967 140.703,245.364 140.722,245.364 140.849,245.491 149.847,245.491 150.99,244.348 150.99,236.106 150.988,236.104 ; 139.317,59.436 143.613,59.436 ; 139.317,92.583 143.613,92.583 ; 139.825,191.389 144.121,191.389 ; 139.825,224.536 144.121,224.536 ; 139.941,45.974 139.941,43.942 140.576,43.307 143.497,43.307 ; 139.941,48.514 141.338,49.911 141.357,49.911 141.484,50.038 150.482,50.038 151.625,48.895 151.625,40.653 151.623,40.651 ; 139.941,64.251 139.952,64.262 141.084,64.262 142.481,62.865 145.161,62.865 147.053,62.865 147.053,78.613 146.799,78.867 141.338,78.867 ; 139.941,97.398 139.952,97.409 141.084,97.409 142.481,96.012 145.161,96.012 147.053,96.012 147.053,111.76 146.799,112.014 141.338,112.014 ; 140.449,177.927 140.449,175.895 141.084,175.26 144.005,175.26 ; 140.449,180.467 141.846,181.864 141.865,181.864 141.992,181.991 150.99,181.991 152.133,180.848 152.133,172.606 152.131,172.604 ; 140.449,196.204 140.46,196.215 141.592,196.215 142.989,194.818 145.669,194.818 147.561,194.818 147.561,210.566 147.307,210.82 141.846,210.82 ; 140.449,229.351 140.46,229.362 141.592,229.362 142.989,227.965 145.669,227.965 147.561,227.965 147.561,243.713 147.307,243.967 141.846,243.967 ; 140.46,29.083 144.756,29.083 ; 140.692,71.374 144.272,71.374 145.161,70.485 146.037,71.361 146.037,75.692 145.402,76.327 141.338,76.327 ; 140.692,104.521 144.272,104.521 145.161,103.632 146.037,104.508 146.037,108.839 145.402,109.474 141.338,109.474 ; 140.968,161.036 145.264,161.036 ; 141.084,33.898 141.095,33.909 142.227,33.909 143.624,32.512 146.304,32.512 148.196,32.512 148.196,48.26 147.942,48.514 142.481,48.514 ; 141.2,203.327 144.78,203.327 145.669,202.438 146.545,203.314 146.545,207.645 145.91,208.28 141.846,208.28 ; 141.2,236.474 144.78,236.474 145.669,235.585 146.545,236.461 146.545,240.792 145.91,241.427 141.846,241.427 ; 141.592,165.851 141.603,165.862 142.735,165.862 144.132,164.465 146.812,164.465 148.704,164.465 148.704,180.213 148.45,180.467 142.989,180.467 ; 141.835,41.021 145.415,41.021 146.304,40.132 147.18,41.008 147.18,45.339 146.545,45.974 142.481,45.974 ; 142.343,172.974 145.923,172.974 146.812,172.085 147.688,172.961 147.688,177.292 147.053,177.927 142.989,177.927 ; 145.161,66.675 143.116,66.675 142.227,67.564 134.353,67.564 134.353,61.087 145.275,61.087 145.413,60.949 145.413,59.436 158.61,59.436 158.991,59.817 158.991,71.501 158.991,74.041 158.991,76.581 158.991,79.121 ; 145.161,99.822 143.116,99.822 142.227,100.711 134.353,100.711 134.353,94.234 145.275,94.234 145.413,94.096 145.413,92.583 158.61,92.583 158.991,92.964 158.991,104.648 158.991,107.188 158.991,109.728 158.991,112.268 ; 145.669,198.628 143.624,198.628 142.735,199.517 134.861,199.517 134.861,193.04 145.783,193.04 145.921,192.902 145.921,191.389 159.118,191.389 159.499,191.77 159.499,203.454 159.499,205.994 159.499,208.534 159.499,211.074 ; 145.669,231.775 143.624,231.775 142.735,232.664 134.861,232.664 134.861,226.187 145.783,226.187 145.921,226.049 145.921,224.536 159.118,224.536 159.499,224.917 159.499,236.601 159.499,239.141 159.499,241.681 159.499,244.221 ; 146.304,36.322 144.259,36.322 143.37,37.211 135.496,37.211 135.496,30.734 146.418,30.734 146.556,30.596 146.556,29.083 159.753,29.083 160.134,29.464 160.134,41.148 160.134,43.688 160.134,46.228 160.134,48.768 ; 146.812,168.275 144.767,168.275 143.878,169.164 136.004,169.164 136.004,162.687 146.926,162.687 147.064,162.549 147.064,161.036 160.261,161.036 160.642,161.417 160.642,173.101 160.642,175.641 160.642,178.181 160.642,180.721 ; 148.323,74.168 148.704,73.787 148.061,73.144 148.061,63.254 148.45,62.865 149.961,62.865 154.535,62.865 154.673,62.727 ; 148.323,107.315 148.704,106.934 148.061,106.291 148.061,96.401 148.45,96.012 149.961,96.012 154.535,96.012 154.673,95.874 ; 148.831,206.121 149.212,205.74 148.569,205.097 148.569,195.207 148.958,194.818 150.469,194.818 155.043,194.818 155.181,194.68 ; 148.831,239.268 149.212,238.887 148.569,238.244 148.569,228.354 148.958,227.965 150.469,227.965 155.043,227.965 155.181,227.827 ; 149.466,43.815 149.847,43.434 149.204,42.791 149.204,32.901 149.593,32.512 151.104,32.512 155.678,32.512 155.816,32.374 ; 149.722,65.405 149.961,65.405 149.961,67.945 ; 149.722,98.552 149.961,98.552 149.961,101.092 ; 149.961,64.135 152.768,64.135 153.16,64.527 154.673,64.527 154.673,66.421 154.292,66.802 153.276,66.802 ; 149.961,70.485 150.48,71.004 ; 149.961,97.282 152.768,97.282 153.16,97.674 154.673,97.674 154.673,99.568 154.292,99.949 153.276,99.949 ; 149.961,103.632 150.48,104.151 ; 149.974,175.768 150.355,175.387 149.712,174.744 149.712,164.854 150.101,164.465 151.612,164.465 156.186,164.465 156.324,164.327 ; 150.077,69.331 149.961,69.215 149.972,69.204 153.657,69.204 156.059,69.204 156.451,69.596 156.451,71.501 ; 150.077,102.478 149.961,102.362 149.972,102.351 153.657,102.351 156.059,102.351 156.451,102.743 156.451,104.648 ; 150.23,197.358 150.469,197.358 150.469,199.898 ; 150.23,230.505 150.469,230.505 150.469,233.045 ; 150.469,196.088 153.276,196.088 153.668,196.48 155.181,196.48 155.181,198.374 154.8,198.755 153.784,198.755 ; 150.469,202.438 150.988,202.957 ; 150.469,229.235 153.276,229.235 153.668,229.627 155.181,229.627 155.181,231.521 154.8,231.902 153.784,231.902 ; 150.469,235.585 150.988,236.104 ; 150.585,201.284 150.469,201.168 150.48,201.157 154.165,201.157 156.567,201.157 156.959,201.549 156.959,203.454 ; 150.585,234.431 150.469,234.315 150.48,234.304 154.165,234.304 156.567,234.304 156.959,234.696 156.959,236.601 ; 150.865,35.052 151.104,35.052 151.104,37.592 ; 151.104,33.782 153.911,33.782 154.303,34.174 155.816,34.174 155.816,36.068 155.435,36.449 154.419,36.449 ; 151.104,40.132 151.623,40.651 ; 151.22,38.978 151.104,38.862 151.115,38.851 154.8,38.851 157.202,38.851 157.594,39.243 157.594,41.148 ; 151.373,167.005 151.612,167.005 151.612,169.545 ; 151.612,165.735 154.419,165.735 154.811,166.127 156.324,166.127 156.324,168.021 155.943,168.402 154.927,168.402 ; 151.612,172.085 152.131,172.604 ; 151.728,170.931 151.612,170.815 151.623,170.804 155.308,170.804 157.71,170.804 158.102,171.196 158.102,173.101 ; 152.514,76.581 156.451,76.581 ; 152.514,109.728 156.451,109.728 ; 153.022,208.534 156.959,208.534 ; 153.022,241.681 156.959,241.681 ; 153.276,74.041 156.451,74.041 ; 153.276,107.188 156.451,107.188 ; 153.657,46.228 157.594,46.228 ; 153.657,71.004 150.48,71.004 ; 153.657,79.121 156.451,79.121 ; 153.657,104.151 150.48,104.151 ; 153.657,112.268 156.451,112.268 ; 153.784,205.994 156.959,205.994 ; 153.784,239.141 156.959,239.141 ; 154.165,178.181 158.102,178.181 ; 154.165,202.957 150.988,202.957 ; 154.165,211.074 156.959,211.074 ; 154.165,236.104 150.988,236.104 ; 154.165,244.221 156.959,244.221 ; 154.419,43.688 157.594,43.688 ; 154.8,40.651 151.623,40.651 ; 154.8,48.768 157.594,48.768 ; 154.927,175.641 158.102,175.641 ; 155.308,172.604 152.131,172.604 ; 155.308,180.721 158.102,180.721
  Top Layer w0.554: 32.118,79.375 32.245,79.502 ; 32.118,112.522 32.245,112.649 ; 32.626,211.328 32.753,211.455 ; 32.626,244.475 32.753,244.602 ; 33.261,49.022 33.388,49.149 ; 33.769,180.975 33.896,181.102 ; 66.281,79.375 66.408,79.502 ; 66.281,112.522 66.408,112.649 ; 66.789,211.328 66.916,211.455 ; 66.789,244.475 66.916,244.602 ; 67.424,49.022 67.551,49.149 ; 67.932,180.975 68.059,181.102 ; 100.444,78.994 100.571,79.121 ; 100.444,112.141 100.571,112.268 ; 100.952,210.947 101.079,211.074 ; 100.952,244.094 101.079,244.221 ; 101.587,48.641 101.714,48.768 ; 102.095,180.594 102.222,180.721 ; 136.131,78.74 136.258,78.867 ; 136.131,111.887 136.258,112.014 ; 136.639,210.693 136.766,210.82 ; 136.639,243.84 136.766,243.967 ; 137.274,48.387 137.401,48.514 ; 137.782,180.34 137.909,180.467
  Bottom Layer w0.454: 30.721,72.517 30.848,67.567 30.848,67.564 ; 30.721,105.664 30.848,100.714 30.848,100.711 ; 31.229,204.47 31.356,199.52 31.356,199.517 ; 31.229,237.617 31.356,232.667 31.356,232.664 ; 31.864,42.164 31.991,37.214 31.991,37.211 ; 32.118,63.5 32.118,60.706 45.58,60.706 47.612,62.738 47.612,76.327 48.501,77.216 ; 32.118,96.647 32.118,93.853 45.58,93.853 47.612,95.885 47.612,109.474 48.501,110.363 ; 32.245,74.422 29.705,74.422 28.816,75.311 28.816,79.756 30.194,81.134 45.218,81.134 46.469,79.883 49.39,79.883 ; 32.245,107.569 29.705,107.569 28.816,108.458 28.816,112.903 30.194,114.281 45.218,114.281 46.469,113.03 49.39,113.03 ; 32.372,174.117 32.499,169.167 32.499,169.164 ; 32.626,195.453 32.626,192.659 46.088,192.659 48.12,194.691 48.12,208.28 49.009,209.169 ; 32.626,228.6 32.626,225.806 46.088,225.806 48.12,227.838 48.12,241.427 49.009,242.316 ; 32.753,206.375 30.213,206.375 29.324,207.264 29.324,211.709 30.702,213.087 45.726,213.087 46.977,211.836 49.898,211.836 ; 32.753,239.522 30.213,239.522 29.324,240.411 29.324,244.856 30.702,246.234 45.726,246.234 46.977,244.983 49.898,244.983 ; 33.261,33.147 33.261,30.353 46.723,30.353 48.755,32.385 48.755,45.974 49.644,46.863 ; 33.388,44.069 30.848,44.069 29.959,44.958 29.959,49.403 31.337,50.781 46.361,50.781 47.612,49.53 50.533,49.53 ; 33.769,165.1 33.769,162.306 47.231,162.306 49.263,164.338 49.263,177.927 50.152,178.816 ; 33.896,176.022 31.356,176.022 30.467,176.911 30.467,181.356 31.845,182.734 46.869,182.734 48.12,181.483 51.041,181.483 ; 38.341,74.295 44.564,74.295 44.691,74.422 ; 38.341,107.442 44.564,107.442 44.691,107.569 ; 38.849,206.248 45.072,206.248 45.199,206.375 ; 38.849,239.395 45.072,239.395 45.199,239.522 ; 39.484,43.942 45.707,43.942 45.834,44.069 ; 39.992,175.895 46.215,175.895 46.342,176.022 ; 49.263,67.818 49.263,74.676 ; 49.263,100.965 49.263,107.823 ; 49.771,199.771 49.771,206.629 ; 49.771,232.918 49.771,239.776 ; 50.406,37.465 50.406,44.323 ; 50.914,169.418 50.914,176.276 ; 64.884,72.517 65.011,67.567 65.011,67.564 ; 64.884,105.664 65.011,100.714 65.011,100.711 ; 65.392,204.47 65.519,199.52 65.519,199.517 ; 65.392,237.617 65.519,232.667 65.519,232.664 ; 66.027,42.164 66.154,37.214 66.154,37.211 ; 66.281,63.5 66.281,60.706 79.743,60.706 81.775,62.738 81.775,76.327 82.664,77.216 ; 66.281,96.647 66.281,93.853 79.743,93.853 81.775,95.885 81.775,109.474 82.664,110.363 ; 66.408,74.422 63.868,74.422 62.979,75.311 62.979,79.756 64.357,81.134 79.381,81.134 80.632,79.883 83.553,79.883 ; 66.408,107.569 63.868,107.569 62.979,108.458 62.979,112.903 64.357,114.281 79.381,114.281 80.632,113.03 83.553,113.03 ; 66.535,174.117 66.662,169.167 66.662,169.164 ; 66.789,195.453 66.789,192.659 80.251,192.659 82.283,194.691 82.283,208.28 83.172,209.169 ; 66.789,228.6 66.789,225.806 80.251,225.806 82.283,227.838 82.283,241.427 83.172,242.316 ; 66.916,206.375 64.376,206.375 63.487,207.264 63.487,211.709 64.865,213.087 79.889,213.087 81.14,211.836 84.061,211.836 ; 66.916,239.522 64.376,239.522 63.487,240.411 63.487,244.856 64.865,246.234 79.889,246.234 81.14,244.983 84.061,244.983 ; 67.424,33.147 67.424,30.353 80.886,30.353 82.918,32.385 82.918,45.974 83.807,46.863 ; 67.551,44.069 65.011,44.069 64.122,44.958 64.122,49.403 65.5,50.781 80.524,50.781 81.775,49.53 84.696,49.53 ; 67.932,165.1 67.932,162.306 81.394,162.306 83.426,164.338 83.426,177.927 84.315,178.816 ; 68.059,176.022 65.519,176.022 64.63,176.911 64.63,181.356 66.008,182.734 81.032,182.734 82.283,181.483 85.204,181.483 ; 72.504,74.295 78.727,74.295 78.854,74.422 ; 72.504,107.442 78.727,107.442 78.854,107.569 ; 73.012,206.248 79.235,206.248 79.362,206.375 ; 73.012,239.395 79.235,239.395 79.362,239.522 ; 73.647,43.942 79.87,43.942 79.997,44.069 ; 74.155,175.895 80.378,175.895 80.505,176.022 ; 83.426,67.818 83.426,74.676 ; 83.426,100.965 83.426,107.823 ; 83.934,199.771 83.934,206.629 ; 83.934,232.918 83.934,239.776 ; 84.569,37.465 84.569,44.323 ; 85.077,169.418 85.077,176.276 ; 99.047,72.136 99.174,67.186 99.174,67.183 ; 99.047,105.283 99.174,100.333 99.174,100.33 ; 99.555,204.089 99.682,199.139 99.682,199.136 ; 99.555,237.236 99.682,232.286 99.682,232.283 ; 100.19,41.783 100.317,36.833 100.317,36.83 ; 100.444,63.119 100.444,60.325 113.906,60.325 115.938,62.357 115.938,75.946 116.827,76.835 ; 100.444,96.266 100.444,93.472 113.906,93.472 115.938,95.504 115.938,109.093 116.827,109.982 ; 100.571,74.041 98.031,74.041 97.142,74.93 97.142,79.375 98.52,80.753 113.544,80.753 114.795,79.502 117.716,79.502 ; 100.571,107.188 98.031,107.188 97.142,108.077 97.142,112.522 98.52,113.9 113.544,113.9 114.795,112.649 117.716,112.649 ; 100.698,173.736 100.825,168.786 100.825,168.783 ; 100.952,195.072 100.952,192.278 114.414,192.278 116.446,194.31 116.446,207.899 117.335,208.788 ; 100.952,228.219 100.952,225.425 114.414,225.425 116.446,227.457 116.446,241.046 117.335,241.935 ; 101.079,205.994 98.539,205.994 97.65,206.883 97.65,211.328 99.028,212.706 114.052,212.706 115.303,211.455 118.224,211.455 ; 101.079,239.141 98.539,239.141 97.65,240.03 97.65,244.475 99.028,245.853 114.052,245.853 115.303,244.602 118.224,244.602 ; 101.587,32.766 101.587,29.972 115.049,29.972 117.081,32.004 117.081,45.593 117.97,46.482 ; 101.714,43.688 99.174,43.688 98.285,44.577 98.285,49.022 99.663,50.4 114.687,50.4 115.938,49.149 118.859,49.149 ; 102.095,164.719 102.095,161.925 115.557,161.925 117.589,163.957 117.589,177.546 118.478,178.435 ; 102.222,175.641 99.682,175.641 98.793,176.53 98.793,180.975 100.171,182.353 115.195,182.353 116.446,181.102 119.367,181.102 ; 106.667,73.914 112.89,73.914 113.017,74.041 ; 106.667,107.061 112.89,107.061 113.017,107.188 ; 107.175,205.867 113.398,205.867 113.525,205.994 ; 107.175,239.014 113.398,239.014 113.525,239.141 ; 107.81,43.561 114.033,43.561 114.16,43.688 ; 108.318,175.514 114.541,175.514 114.668,175.641 ; 117.589,67.437 117.589,74.295 ; 117.589,100.584 117.589,107.442 ; 118.097,199.39 118.097,206.248 ; 118.097,232.537 118.097,239.395 ; 118.732,37.084 118.732,43.942 ; 119.24,169.037 119.24,175.895 ; 134.734,71.882 134.861,66.932 134.861,66.929 ; 134.734,105.029 134.861,100.079 134.861,100.076 ; 135.242,203.835 135.369,198.885 135.369,198.882 ; 135.242,236.982 135.369,232.032 135.369,232.029 ; 135.877,41.529 136.004,36.579 136.004,36.576 ; 136.131,62.865 136.131,60.071 149.593,60.071 151.625,62.103 151.625,75.692 152.514,76.581 ; 136.131,96.012 136.131,93.218 149.593,93.218 151.625,95.25 151.625,108.839 152.514,109.728 ; 136.258,73.787 133.718,73.787 132.829,74.676 132.829,79.121 134.207,80.499 149.231,80.499 150.482,79.248 153.403,79.248 ; 136.258,106.934 133.718,106.934 132.829,107.823 132.829,112.268 134.207,113.646 149.231,113.646 150.482,112.395 153.403,112.395 ; 136.385,173.482 136.512,168.532 136.512,168.529 ; 136.639,194.818 136.639,192.024 150.101,192.024 152.133,194.056 152.133,207.645 153.022,208.534 ; 136.639,227.965 136.639,225.171 150.101,225.171 152.133,227.203 152.133,240.792 153.022,241.681 ; 136.766,205.74 134.226,205.74 133.337,206.629 133.337,211.074 134.715,212.452 149.739,212.452 150.99,211.201 153.911,211.201 ; 136.766,238.887 134.226,238.887 133.337,239.776 133.337,244.221 134.715,245.599 149.739,245.599 150.99,244.348 153.911,244.348 ; 137.274,32.512 137.274,29.718 150.736,29.718 152.768,31.75 152.768,45.339 153.657,46.228 ; 137.401,43.434 134.861,43.434 133.972,44.323 133.972,48.768 135.35,50.146 150.374,50.146 151.625,48.895 154.546,48.895 ; 137.782,164.465 137.782,161.671 151.244,161.671 153.276,163.703 153.276,177.292 154.165,178.181 ; 137.909,175.387 135.369,175.387 134.48,176.276 134.48,180.721 135.858,182.099 150.882,182.099 152.133,180.848 155.054,180.848 ; 142.354,73.66 148.577,73.66 148.704,73.787 ; 142.354,106.807 148.577,106.807 148.704,106.934 ; 142.862,205.613 149.085,205.613 149.212,205.74 ; 142.862,238.76 149.085,238.76 149.212,238.887 ; 143.497,43.307 149.72,43.307 149.847,43.434 ; 144.005,175.26 150.228,175.26 150.355,175.387 ; 153.276,67.183 153.276,74.041 ; 153.276,100.33 153.276,107.188 ; 153.784,199.136 153.784,205.994 ; 153.784,232.283 153.784,239.141 ; 154.419,36.83 154.419,43.688 ; 154.927,168.783 154.927,175.641